# Altium PCB Main.PcbDoc (part 2 of 2)
Units mm, origin at the board's own origin, x right, y up, seen from the top; angles counter-clockwise.
Board outline 55 x 61 mm, 2 copper layers (Top Layer, Bottom Layer); 103 components, 75 nets, 531 pads, 187 vias.
Unrouted connection lines stored in the file: 83.
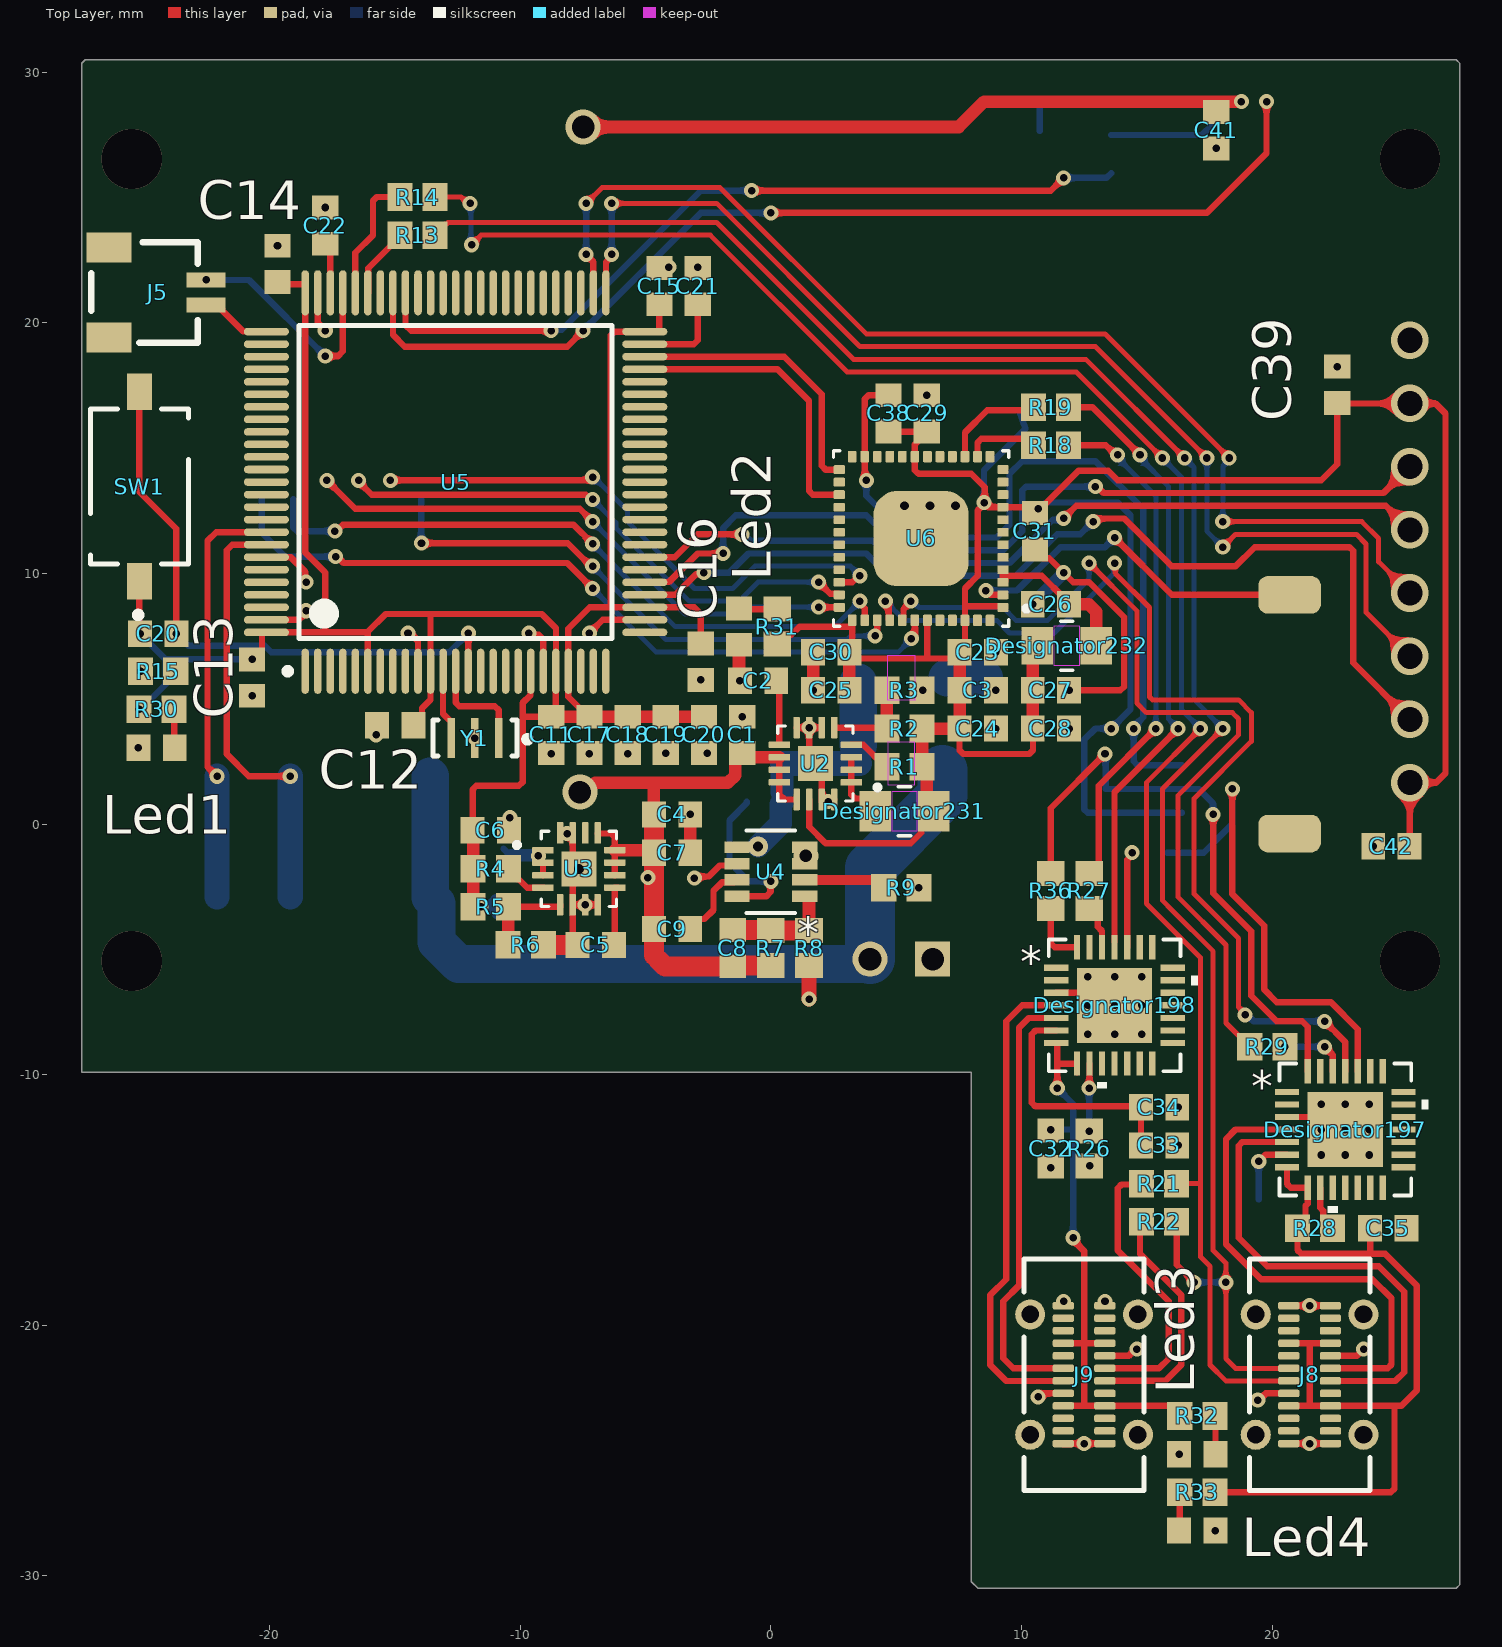
[diagram p0: Top Layer view]

## Silkscreen, mask and mechanical layers (free items; w line width, h text height)
Mechanical 1:
  the board outline again, w0.2

## Text inside footprints (layer, text, board x,y; h text height)
Designator197: Top Overlay "*" at 19.164,-11.077 h1.27; Top 3D Body "*" at 20.764,-11.077 h1.27
Designator198: Top Overlay "*" at 9.957,-6.124 h1.27; Top 3D Body "*" at 11.557,-6.124 h1.27
U4: Top Overlay "*" at 1.924,-3.21 h1.27 r180; Top 3D Body "*" at 0.787,-2.083 h1.27 r180